# EAGLE board micropov (EAGLE 5.10)
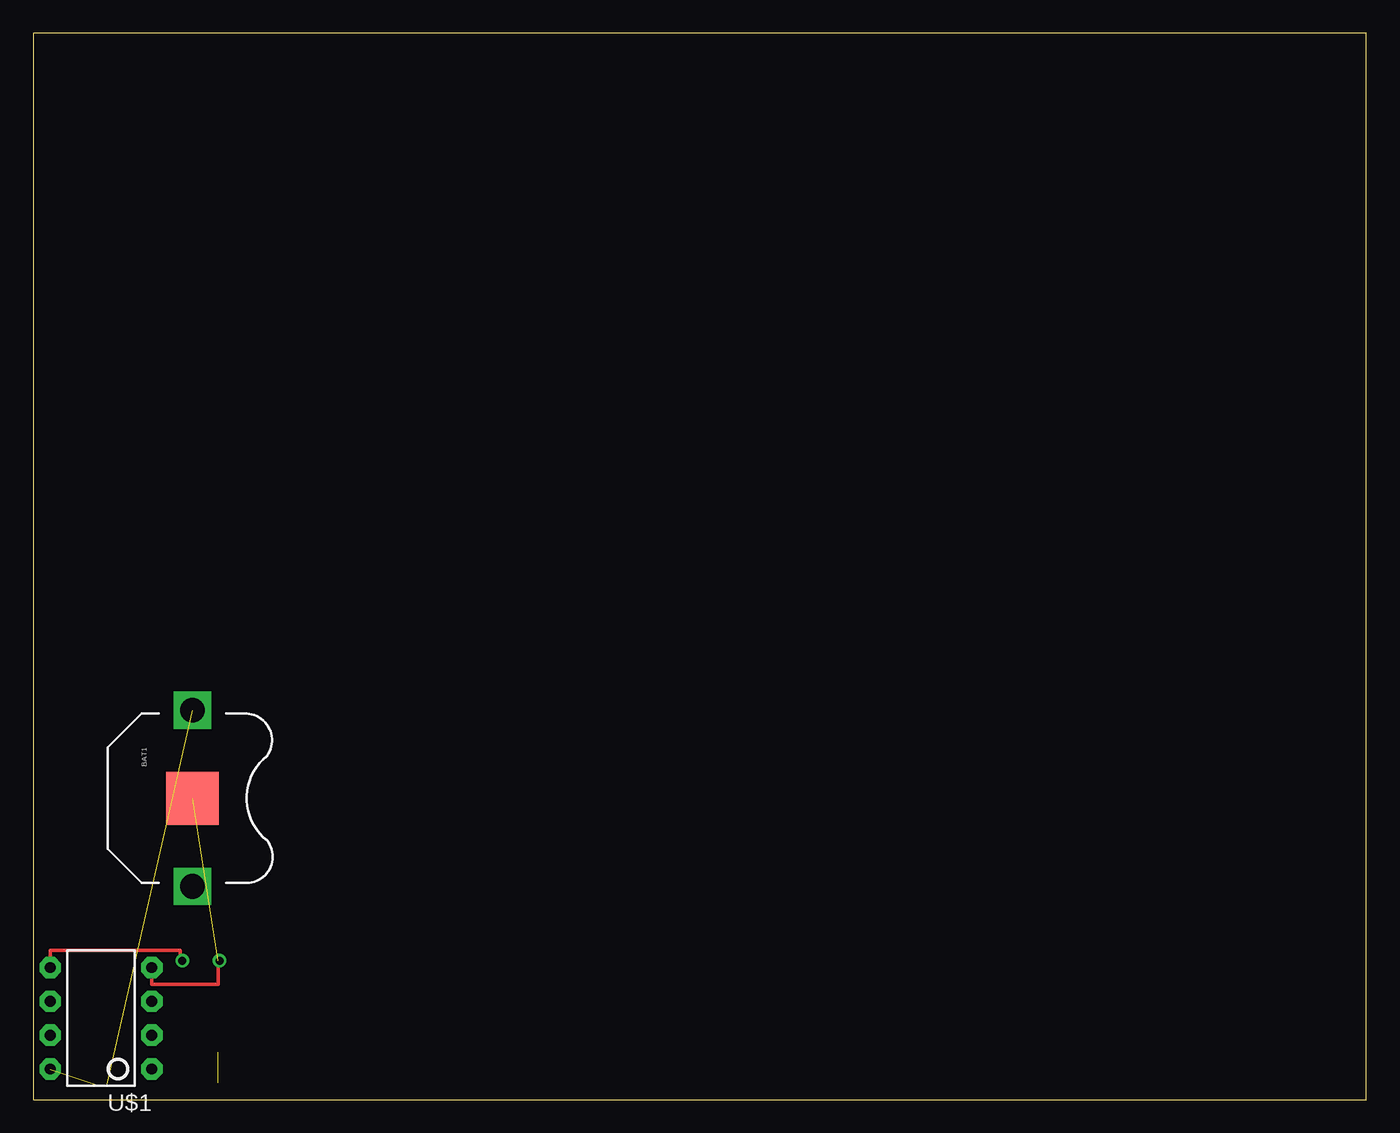
[diagram p0: board, top side]
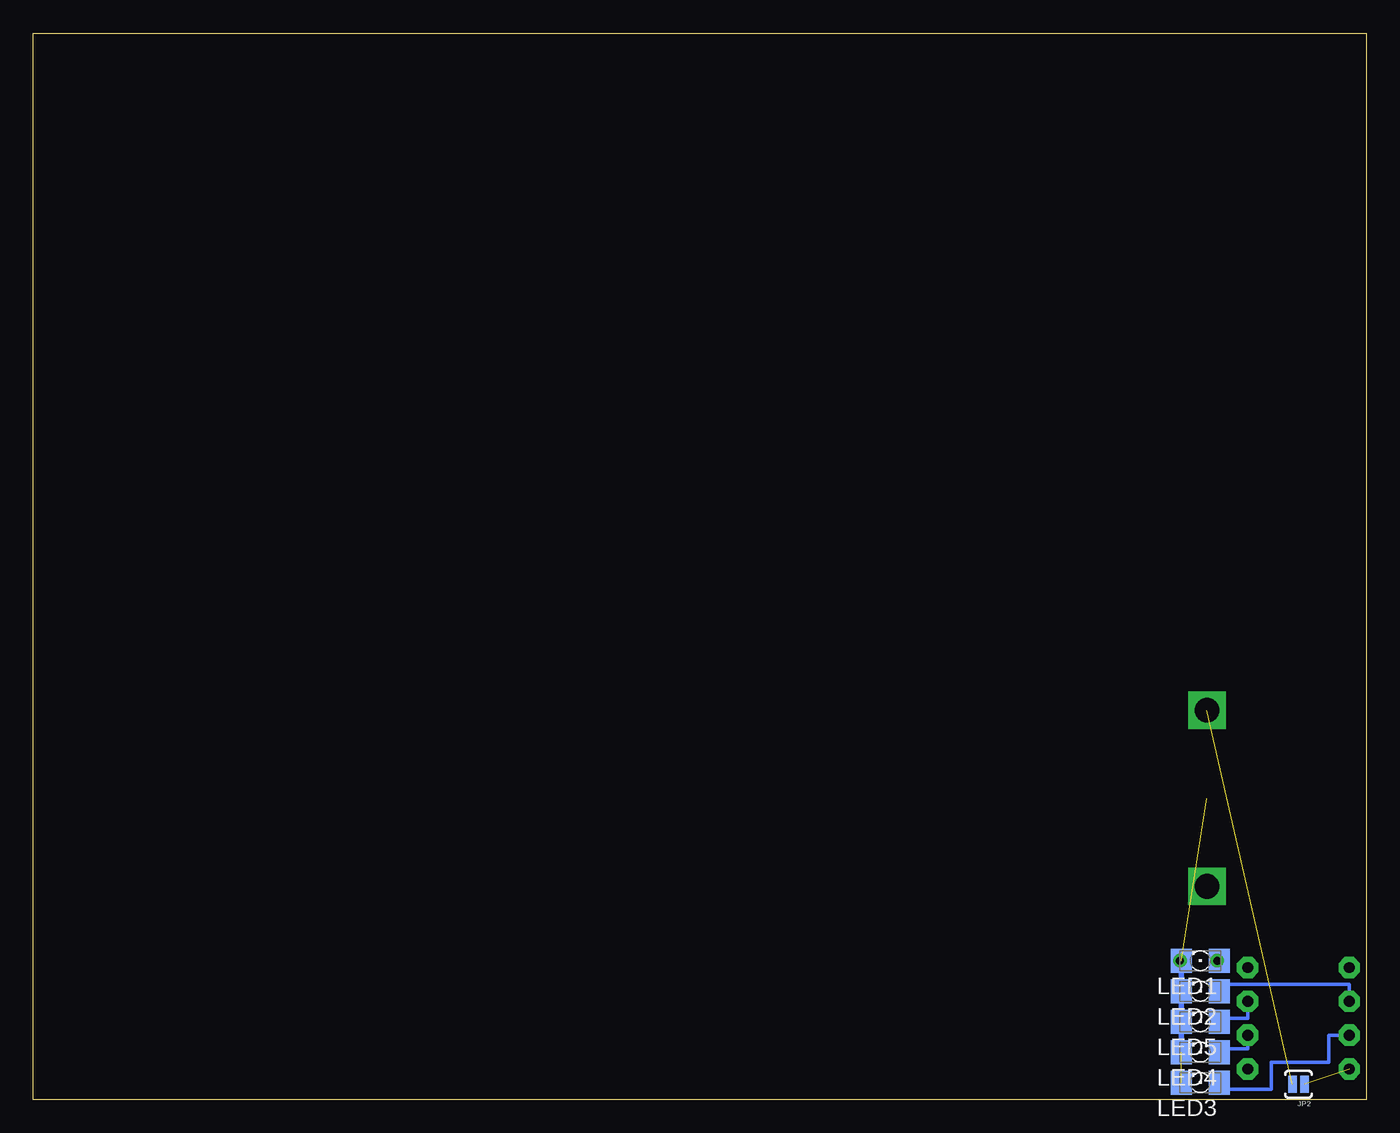
[diagram p1: board, bottom side, seen from below]

Size 100 x 80 mm. Coordinates in mm from the lower left corner, seen from the top.
Outline: 0,0 100,0 100,80 0,80 0,0
Copper layers (1*16): Top 0.035mm / dielectric 1.5mm / Bottom 0.035mm
Design rules "default": minimum track width 10mil, minimum drill 24mil, track to track 8mil, track to pad 8mil, pad to pad 8mil, via to via 8mil, smd to smd 8mil, copper to edge 40mil, drill to drill 8mil, minimum pad ring 10mil, minimum via ring 8mil, stop-mask expansion 4mil, vias tented up to drill 0mil, thermal gap 10mil

## Footprints (pad centres in the part's own frame; a part is rotated, then mirrored left to right if it is on the bottom)
BATTCON_12MM_PTH = smd 3.962 x 3.962: GND 0,0 | drill 1.854 square: VCC@1 -6.604,0; VCC@2 6.604,0
SJ_2S-NO = smd 0.635 x 1.27: 1 -0.45,0; 2 0.45,0
1206 = smd 1.6 x 1.803: A -1.422,0; C 1.422,0
DIP08 = drill 0.813 pad 1.6 octagon: 1 -3.81,-3.81; 2 -1.27,-3.81; 3 1.27,-3.81; 4 3.81,-3.81; 5 3.81,3.81; 6 1.27,3.81; 7 -1.27,3.81; 8 -3.81,3.81

## Placement (x,y rotation side)
BAT1  [BATTCON_12MM_PTH]  11.94,22.61 270 top
JP2  [SJ_2S-NO]  5.08,1.14 180 bottom
LED1  [1206]  12.45,10.41 180 bottom
LED2  [1206]  12.45,8.13 180 bottom
LED3  [1206]  12.45,1.27 180 bottom
LED4  [1206]  12.45,3.56 180 bottom
LED5  [1206]  12.45,5.84 180 bottom
U$1  ATTINY13DIP  [DIP08]  5.08,6.1 90 top

## Library data of the parts
BAT1 JP2 U$1 = SparkFun
LED1-LED5 = led

## Nets
GND: BAT1.GND LED1.C LED2.C LED3.C LED4.C LED5.C U$1.4
MISO: LED2.A U$1.6
MOSI: LED1.A U$1.5
N$4: LED4.A U$1.2
N$5: LED5.A U$1.3
N$10: JP2.1 U$1.8
RESET: U$1.1
SCK: LED3.A U$1.7
VCC: BAT1.VCC@1 JP2.2

## Tracks (layer width: path | path; a pad name or v marks a point on that pad's centre or on a via)
GND  (via drill 0.6)  (2 unrouted)
  Top 0.254: U$1.4 8.89,8.64 13.87,8.64 LED1.C v13.97,10.41
  Bottom 0.254: v13.97,10.41 LED1.C
  Bottom 0.406: LED1.C LED2.C LED5.C LED4.C
MISO
  Bottom 0.254: LED2.A 10.67,8.13 10.67,8.64 1.27,8.64 U$1.6
MOSI  (via drill 0.6)
  Top 0.254: U$1.5 1.27,11.18 11.02,11.18 LED1.A v11.18,10.41
  Bottom 0.254: LED1.A v11.18,10.41
N$4
  Bottom 0.254: U$1.2 8.89,3.81 11.02,3.81 LED4.A
N$5
  Bottom 0.254: LED5.A 10.67,5.84 10.67,6.1 8.89,6.1 U$1.3
N$10  (1 unrouted)
SCK
  Bottom 0.254: LED3.A 10.41,1.27 10.41,0.76 7.11,0.76 7.11,2.79 2.79,2.79 2.79,4.83 U$1.7
VCC  (1 unrouted)